# Altium PCB car ver1.PrjPCB.PcbDoc
Units mil, origin at the board's own origin, x right, y up, seen from the top; angles counter-clockwise.
Board outline 5825.03 x 2850.01 mil, 2 copper layers (Top Layer, Bottom Layer); 95 components, 142 nets, 389 pads, 71 vias.
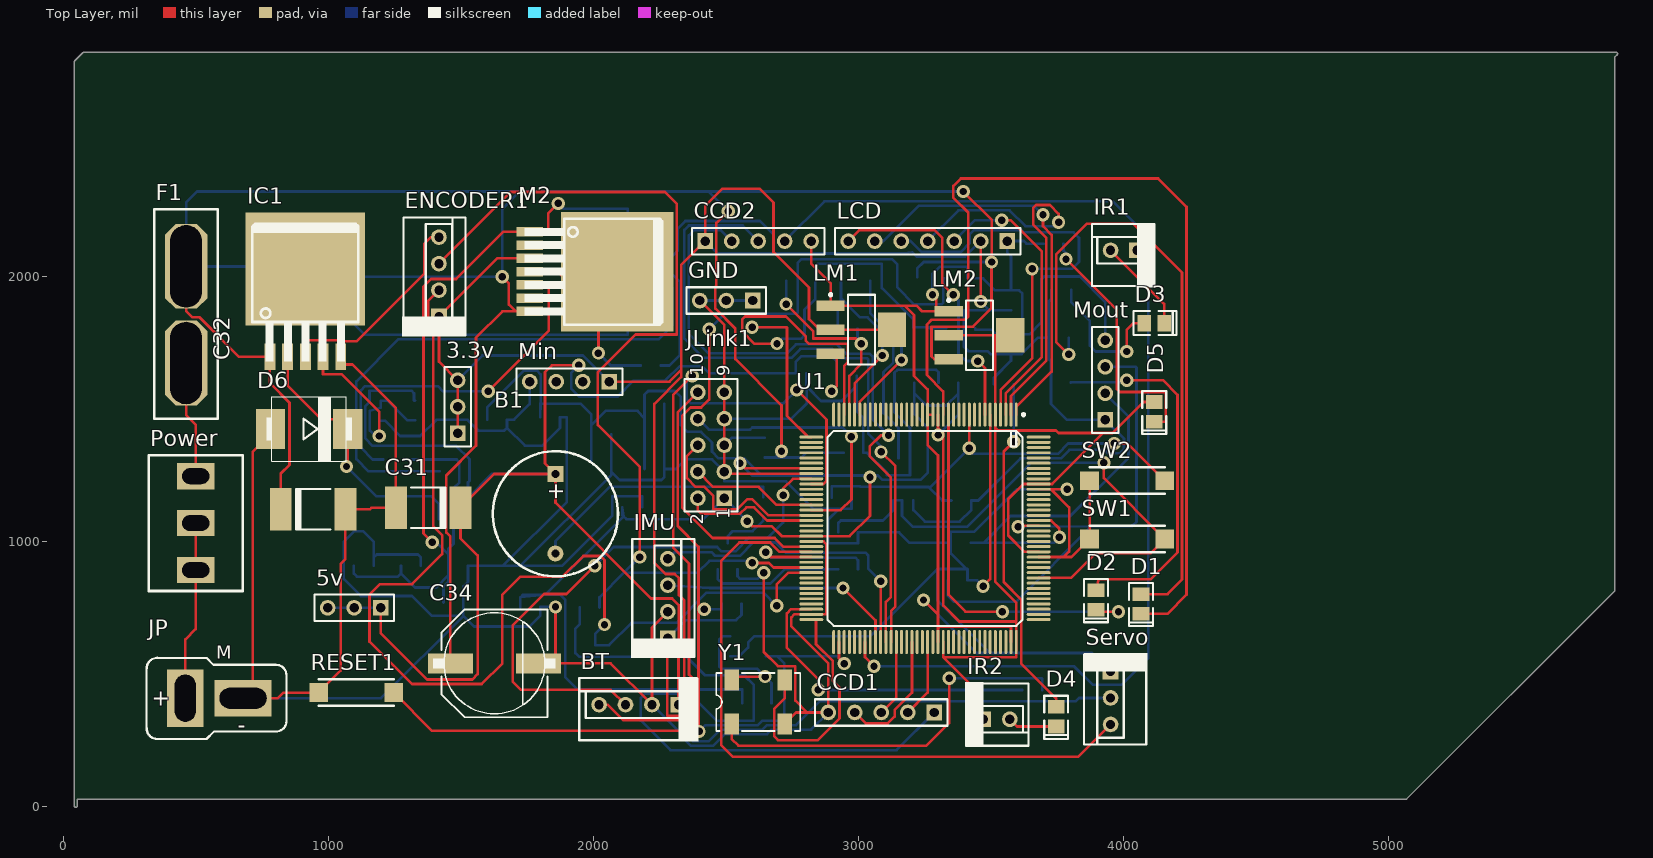
[diagram p0: Top Layer view]
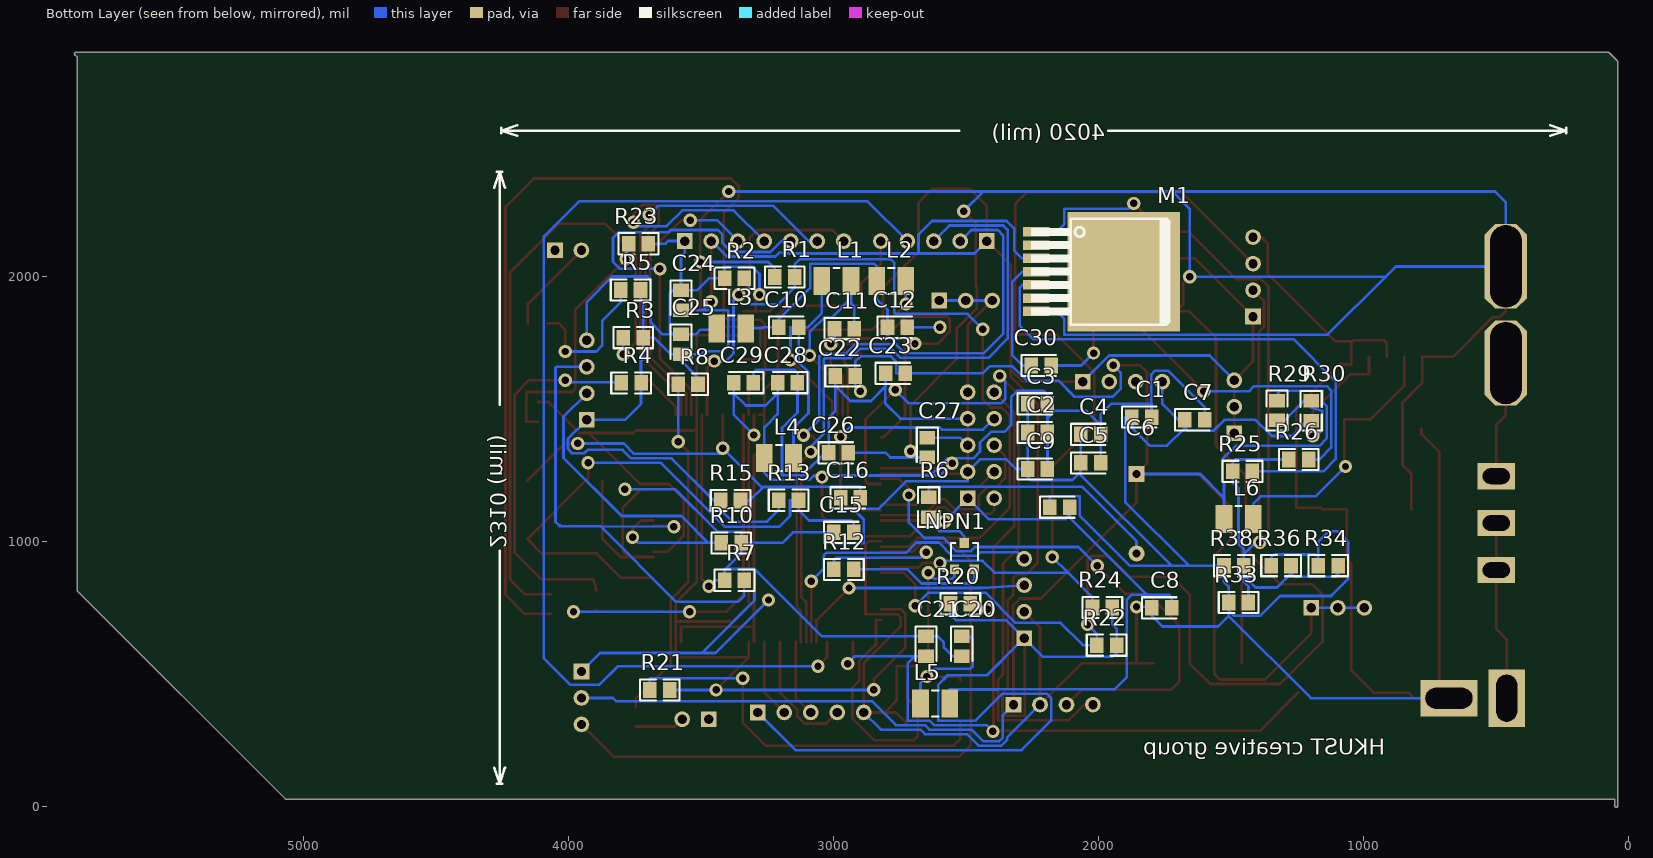
[diagram p1: Bottom Layer view, seen from below]

## Layer stack, top to bottom
Top Solder: solder mask 0.4, Solder Resist, Dk 3.5
Top Layer: signal copper 1.4
Dielectric 1: dielectric 12.6, FR-4, Dk 4.8
Bottom Layer: signal copper 1.4
Bottom Solder: solder mask 0.4, Solder Resist, Dk 3.5

## Board outline
39.98,0 39.98,2810 cw(c45,2810) 41.47,2813.56 41.45,2813.55 71.45,2843.55 71.44,2843.53 cw(c75,2840) 75,2845.02 5860,2845.02 cw(c5860,2840) 5865.01,2840 cw(c5860,2840) 5863.53,2836.44 5863.55,2836.45 5855.01,2827.92 5855.01,815 cw(c5850,815) 5853.53,811.44 5853.55,811.45 5068.55,26.45 5068.56,26.47 cw(c5065,30) 5065,24.98 50.02,24.98 50.02,0 cw(c45,0)

## Design rules (kind name [scope] priority, off if disabled: settings)
Clearance [All] p1: gap=7
HoleSize [All] p1: absolutevalues=TRUE maxlimit=248.03 minlimit=13.78 maxpercent=80.000 minpercent=20.000
PolygonConnect [All] p1: connectstyle=Relief reliefconductorwidth=10 reliefentries=4 polygonreliefangle="90 Angle" airgapwidth=10
RoomDefinition sc-internal [InComponentClass('sc-internal')] p1: confinementstyle=ConfineIn formatcopy=TRUE lockcomponents=FALSE outline 245.63,113.53 4246,113.53 4246,2435.41 245.63,2435.41
RoutingVias [All] p1: holewidth=28 width=50 viastyle="Through Hole" minholewidth=28 minwidth=50 maxholewidth=28 maxwidth=50
SolderMaskExpansion [All] p1: expansion=4
Width [All] p1: maxlimit=10 minlimit=10 preferedwidth=10
28 further rules are at their usual default settings.

## Components (designator, comment, footprint, x,y, rotation, side; value= is the part's Value field where it differs from the comment)
3.3v "Header 3" HDR1X3 1486.48,1407.53 r90 top (schematic designator 1)
5v "Header 3" HDR1X3 1195.63,748.53 r180 top (schematic designator 2)
B1 "Buzzer" Buzzer 1855.63,953.53 r90 top
BT "Bluetooth" 6410-04 2320.63,383.53 r180 top
C1 "100n" CC2012-0805 1835.63,1468.53 r180 bottom
C2 "100n" CC2012-0805 2229.49,1410.53 r180 bottom
C3 "100n" CC2012-0805 2229.5,1518.53 r180 bottom
C4 "100n" CC2012-0805 2028.5,1403.53 r180 bottom
C5 "100n" CC2012-0805 2028.5,1295.53 r180 bottom
C6 "100n" CC2012-0805 2145.63,1128.53 r180 bottom
C7 "100n" CC2012-0805 1635.63,1458.53 r180 bottom
C8 "100n" CC2012-0805 1760.63,748.53 r180 bottom
C9 "100n" CC2012-0805 2229.49,1272.53 r180 bottom
C10 "1u" CC2012-0805 3168.49,1807.53 r180 bottom
C11 "1u" CC2012-0805 2958.49,1802.53 r180 bottom
C12 "100n" CC2012-0805 2758.49,1807.53 r180 bottom
C15 "100nF" CC2012-0805 2960.63,1033.53 r180 bottom
C16 "100nF" CC2012-0805 2935.63,1163.53 r180 bottom
C20 "100n" CC2012-0805 2515.63,603.53 r270 bottom
C21 "100nF" CC2012-0805 2650.63,603.53 r270 bottom
C22 "10uF" CC2012-0805 2955.63,1623.53 r180 bottom
C23 "100nF" CC2012-0805 2765.63,1633.53 r180 bottom
C24 "100nF" CC2012-0805 3575.48,1909.75 r270 bottom
C25 "10uF" CC2012-0805 3575.48,1743.76 r270 bottom
C26 "10uF" CC2012-0805 2980.63,1333.53 r180 bottom
C27 "100nF" CC2012-0805 2645.63,1353.53 r270 bottom
C28 "100nF" CC2012-0805 3173.23,1598.53 r0 bottom
C29 "10uF" CC2012-0805 3339.22,1598.53 r0 bottom
C30 "100n" CC2012-0805 2215.63,1663.53 r180 bottom
C31 "220uF" CAPC7238N 1375.63,1128.53 r180 top
C32 "220uF" CAPC7238N 940.63,1118.53 r0 top
C34 "470uF/16V" SV-G 1625.63,538.53 r0 top
CCD1 "Header 5" HDR1X5 3285.63,353.53 r180 top
CCD2 "Header 5" HDR1X5 2421,2133 r0 top
D1 "LED" "SMD _LED" 4066,763 r90 top
D2 "LED" "SMD _LED" 3896,778 r90 top
D3 "LED" "SMD _LED" 4116,1823 r180 top
D4 "LED" "SMD _LED" 3746,338 r90 top
D5 "LED" "SMD _LED" 4116,1488 r90 top
D6 "D Schottky" SMC 910.63,1423.53 r180 top
ENCODER1 "" 6410-04 1416.48,1847.53 r90 top
F1 "20A Fuse" FUSE 461.48,1442.53 r90 top
GND "Header 3" HDR1X3 2600.63,1908.53 r180 top (schematic designator GND1)
IC1 "AP1501A" TO-263(5) 1306.48,2232.53 r0 top
IMU "" 6410-04 2280.63,633.53 r90 top (schematic designator I1)
IR1 "Header 2" 6410-02 4051,2098 r180 top (schematic designator P1)
IR2 "Header 2" 6410-02 3471,328 r0 top (schematic designator P2)
JLink1 "ISP" HDR2X5 2493.49,1162.53 r90 top
JP "BAT" "T-CONNECTOR (M)" 448.49,407.53 r0 top (schematic designator JP1)
L1 "10uH" CR3225-1210 2988.49,1982.53 r180 bottom
L2 "10uH" CR3225-1210 2781.48,1982.53 r180 bottom
L3 "10uH" CR3225-1210 3385.63,1803.53 r180 bottom
L4 "10uH" CR3225-1210 3205.63,1313.53 r180 bottom
L5 "10uH" CR3225-1210 2616,388 r0 bottom
L6 "22uH" CR3225-1210 1470.63,1083.53 r180 bottom
LCD "Header 7" HDR1X7 3561,2133 r180 top
LM1 "LM1117IMP-3.3" MP04A_M 3010.63,1798.53 r0 top
LM2 "LM1117IMP-3.3" MP04A_M 3456.48,1777.53 r0 top
M1 "BTN7971B" TO-263(7) 2233.49,1817.53 r0 bottom
M2 "BTN7971B" TO-263(7) 1758.49,1817.53 r180 top
Min "PWR" HDR1X4 2058.49,1602.53 r180 top (schematic designator Min1)
Mout "PWR" HDR1X4 3931,1458 r90 top (schematic designator Mout1)
NPN1 "BC847B" SOT-23 2505.63,943.53 r180 bottom
Power "toggle SWITCH" ToggleSwitch 320.63,418.53 r0 top (schematic designator sw3)
R1 "30k" CR2012-0805 3183.49,1997.53 r0 bottom
R2 "20k" CR2012-0805 3373.49,1992.53 r180 bottom
R3 "1k2" CR2012-0805 3755.63,1768.53 r180 bottom
R4 "1k2" CR2012-0805 3763.49,1597.53 r180 bottom
R5 "1k2" CR2012-0805 3765.63,1948.53 r180 bottom
R6 "330" CR2012-0805 2640.63,1128.53 r270 bottom
R7 "1k2" CR2012-0805 3373.49,852.53 r180 bottom
R8 "1k2" CR2012-0805 3548.49,1592.53 r180 bottom
R10 "1k2" CR2012-0805 3385.63,993.53 r0 bottom
R12 "10k" CR2012-0805 2960.63,893.53 r180 bottom
R13 "33" CR2012-0805 3169.24,1154.53 r180 bottom
R15 "4k7" CR2012-0805 3388.23,1153.53 r180 bottom
R20 "4k7" CR2012-0805 2520.63,763.53 r180 bottom
R21 "1k" CR2012-0805 3655.63,438.53 r180 bottom
R22 "10k" CR2012-0805 1968.49,607.53 r180 bottom
R23 "1k" CR2012-0805 3736,2123 r180 bottom
R24 "10k" CR2012-0805 1984.5,749.59 r180 bottom
R25 "5k1" CR2012-0805 1455.63,1263.53 r180 bottom
R26 "5k1" CR2012-0805 1243.23,1308.53 r180 bottom
R29 "4k7" CR2012-0805 1325.63,1493.53 r270 bottom
R30 "1k5" CR2012-0805 1196.48,1492.53 r270 bottom
R33 "0" CR2012-0805 1470.63,768.53 r180 bottom
R34 "0" CR2012-0805 1132.18,907.53 r180 bottom
R36 "0" CR2012-0805 1310.18,907.53 r180 bottom
R38 "0" CR2012-0805 1488.18,907.53 r180 bottom
RESET1 "RESET" PUSHBUTTOM 1245.63,428.53 r180 top
Servo "Header 3" 6410-03 3951,508 r270 top (schematic designator Servo1)
SW1 "" PUSHBUTTOM 4155.63,1008.53 r180 top
SW2 "" PUSHBUTTOM 4155.63,1228.53 r180 top
U1 "kinetis k60" LQFP50P2200X2200X160-144M 3250.63,1048.53 r270 top
Y1 "50MHZ" XTLOSC4_SM 2621,393 r0 top

## Footprints (in the part's own frame and the unit in brackets; to place one, negate y for a bottom-side part, rotate by r counter-clockwise, add the part's x,y. Pads: shape width x height; smd on the part's side, far side on the other; paste and mask are expansions set on the pad)
6410-02 [mm] "MOLEX 2.54mm KK CONNECTOR"
  rect 1.5x1.5 hole 0.9: 1(0,0)
  round 1.5 hole 0.9: 2(2.54,0)
  silkscreen extent -1.78,-2.54 4.32,3.56
6410-03 [mm] "MOLEX 2.54mm KK CONNECTOR"
  rect 1.5x1.5 hole 0.9: 1(-0.005,0)
  round 1.5 hole 0.9: 2(2.535,0) 3(5.075,0)
  silkscreen extent -1.78,-2.54 6.99,3.56
6410-04 [mm] "MOLEX 2.54mm KK CONNECTOR"
  rect 1.5x1.5 hole 0.9: 1(0.012,0.012)
  round 1.5 hole 0.9: 2(2.552,0.012) 3(5.092,0.012) 4(7.632,0.012)
  silkscreen extent -1.91,-2.54 9.53,3.56
Buzzer [mil]
  round 60 hole 30: 1(0,0)
  rect 60x60 hole 30: 2(300,0)
  silkscreen extent -86,-236 386,236, body extent -89,-235 519,237, height 380
CAPC7238N [mm] "Chip Capacitor, Body 7.2x3.8mm, IPC Medium Density"
  rect 2.1x4.1 smd: 1(-3.095,0.052) 2(3.105,0.052)
  silkscreen extent -1.65,-1.9 1.66,2, body extent -3.8,-2.29 3.8,2.31, height 3.1
CC2012-0805 [mm] "Chip Capacitor; Body 2.0 x 1.2 mm (LxW typ)"
  rect 1.3x1.5 smd: 1(-0.95,0) 2(0.95,0)
  silkscreen extent -1.91,-1.02 1.4,1.02, body extent -1,-0.64 1,0.62, height 0.78
CR2012-0805 [mm] "Chip Resistor; Body 2.0 x 1.3 mm (LxW typ)"
  rect 1.3x1.5 smd: 1(-0.95,0) 2(0.95,0)
  silkscreen extent -1.91,-1.02 1.91,1.02, body extent -1,-0.62 1,0.64, height 0.78
CR3225-1210 [mm] "Chip Resistor; Body 3.2 x 2.5 mm (LxW typ)"
  rect 1.6x2.7 smd: 1(-1.4,0) 2(1.4,0)
  silkscreen extent -0.3,-1.25 0.3,1.25, body extent -1.6,-1.27 1.6,1.23, height 1.35
FUSE [mil]
  oct 320x160 hole 120 slot 310 at 0 deg: 1(230,0) 2(595,0)
  silkscreen extent 20,-120 810,120
HDR1X3 [mm] "Connector; Header; 3 Position"
  rect 1.5x1.5 hole 0.9: 1(0,0)
  round 1.5 hole 0.9: 2(2.54,0) 3(5.08,0)
  silkscreen extent -1.27,-1.27 6.35,1.27
HDR1X4 [mm] "Connector; Header; 4 Position"
  rect 1.5x1.5 hole 0.9: 1(0,0)
  round 1.5 hole 0.9: 2(2.54,0) 3(5.08,0) 4(7.62,0)
  silkscreen extent -1.27,-1.27 8.89,1.27
HDR1X5 [mm] "Connector; Header; 5 Position"
  rect 1.5x1.5 hole 0.9: 1(0,0)
  round 1.5 hole 0.9: 2(2.54,0) 3(5.08,0) 4(7.62,0) 5(10.16,0)
  silkscreen extent -1.27,-1.27 11.43,1.27
HDR1X7 [mm] "Connector; Header; 7 Position"
  rect 1.5x1.5 hole 0.9: 1(0,0)
  round 1.5 hole 0.9: 2(2.54,0) 3(5.08,0) 4(7.62,0) 5(10.16,0) 6(12.7,0) 7(15.24,0)
  silkscreen extent -1.27,-1.27 16.51,1.27
HDR2X5 [mm] "Connector; Header; 5x2 Position"
  rect 1.5x1.5 hole 0.9: 1(0,0)
  round 1.5 hole 0.9: 2(0,2.54) 3(2.54,0) 4(2.54,2.54) 5(5.08,0) 6(5.08,2.54) 7(7.62,0) 8(7.62,2.54) 9(10.16,0) 10(10.16,2.54)
  silkscreen extent -1.27,-1.27 11.43,3.81
LQFP50P2200X2200X160-144M [mm] "LQFP, 144-Leads, Body 22.1x22.1mm (max), Pitch 0.50mm, IPC Low Density"
  oval 2.3x0.282 smd: 1(-10.9,8.75) 2(-10.9,8.25) 3(-10.9,7.75) 4(-10.9,7.25) 5(-10.9,6.75) 6(-10.9,6.25) 7(-10.9,5.75) 8(-10.9,5.25) 9(-10.9,4.75) 10(-10.9,4.25) 11(-10.9,3.75) 12(-10.9,3.25) 13(-10.9,2.75) 14(-10.9,2.25) 15(-10.9,1.75) 16(-10.9,1.25) 17(-10.9,0.75) 18(-10.9,0.25) 19(-10.9,-0.25) 20(-10.9,-0.75) 21(-10.9,-1.25) 22(-10.9,-1.75) 23(-10.9,-2.25) 24(-10.9,-2.75) 25(-10.9,-3.25) 26(-10.9,-3.75) 27(-10.9,-4.25) 28(-10.9,-4.75) 29(-10.9,-5.25) 30(-10.9,-5.75) 31(-10.9,-6.25) 32(-10.9,-6.75) 33(-10.9,-7.25) 34(-10.9,-7.75) 35(-10.9,-8.25) 36(-10.9,-8.75) 73(10.9,-8.75) 74(10.9,-8.25) 75(10.9,-7.75) 76(10.9,-7.25) 77(10.9,-6.75) 78(10.9,-6.25) 79(10.9,-5.75) 80(10.9,-5.25) 81(10.9,-4.75) 82(10.9,-4.25) 83(10.9,-3.75) 84(10.9,-3.25) 85(10.9,-2.75) 86(10.9,-2.25) 87(10.9,-1.75) 88(10.9,-1.25) 89(10.9,-0.75) 90(10.9,-0.25) 91(10.9,0.25) 92(10.9,0.75) 93(10.9,1.25) 94(10.9,1.75) 95(10.9,2.25) 96(10.9,2.75) 97(10.9,3.25) 98(10.9,3.75) 99(10.9,4.25) 100(10.9,4.75) 101(10.9,5.25) 102(10.9,5.75) 103(10.9,6.25) 104(10.9,6.75) 105(10.9,7.25) 106(10.9,7.75) 107(10.9,8.25) 108(10.9,8.75)
  oval 0.282x2.3 smd: 37(-8.75,-10.9) 38(-8.25,-10.9) 39(-7.75,-10.9) 40(-7.25,-10.9) 41(-6.75,-10.9) 42(-6.25,-10.9) 43(-5.75,-10.9) 44(-5.25,-10.9) 45(-4.75,-10.9) 46(-4.25,-10.9) 47(-3.75,-10.9) 48(-3.25,-10.9) 49(-2.75,-10.9) 50(-2.25,-10.9) 51(-1.75,-10.9) 52(-1.25,-10.9) 53(-0.75,-10.9) 54(-0.25,-10.9) 55(0.25,-10.9) 56(0.75,-10.9) 57(1.25,-10.9) 58(1.75,-10.9) 59(2.25,-10.9) 60(2.75,-10.9) 61(3.25,-10.9) 62(3.75,-10.9) 63(4.25,-10.9) 64(4.75,-10.9) 65(5.25,-10.9) 66(5.75,-10.9) 67(6.25,-10.9) 68(6.75,-10.9) 69(7.25,-10.9) 70(7.75,-10.9) 71(8.25,-10.9) 72(8.75,-10.9) 109(8.75,10.9) 110(8.25,10.9) 111(7.75,10.9) 112(7.25,10.9) 113(6.75,10.9) 114(6.25,10.9) 115(5.75,10.9) 116(5.25,10.9) 117(4.75,10.9) 118(4.25,10.9) 119(3.75,10.9) 120(3.25,10.9) 121(2.75,10.9) 122(2.25,10.9) 123(1.75,10.9) 124(1.25,10.9) 125(0.75,10.9) 126(0.25,10.9) 127(-0.25,10.9) 128(-0.75,10.9) 129(-1.25,10.9) 130(-1.75,10.9) 131(-2.25,10.9) 132(-2.75,10.9) 133(-3.25,10.9) 134(-3.75,10.9) 135(-4.25,10.9) 136(-4.75,10.9) 137(-5.25,10.9) 138(-5.75,10.9) 139(-6.25,10.9) 140(-6.75,10.9) 141(-7.25,10.9) 142(-7.75,10.9) 143(-8.25,10.9) 144(-8.75,10.9)
  silkscreen extent -11.02,-9.35 9.35,9.57, body extent -11,-11 11,11, height 1.6
MP04A_M [mm] "SOT223, 4-Leads, Body 6.5x3.5mm, Pitch 2.3mm, Lead Span 7mm, IPC Low Density"
  rect 2.7x1 smd: 1(-2.95,2.3) 2(-2.95,0) 3(-2.95,-2.3)
  rect 2.7x3.3 smd: 4(2.95,0)
  silkscreen extent -3.07,-3.35 1.3,3.47, body extent -1.85,-3.35 1.85,3.35, height 1.8
PUSHBUTTOM [mm]
  rect 1.8x1.8 smd: 1(7.2,0) 2(0,0)
  silkscreen extent 0,-1.27 7.2,1.27
SMC [mm]
  rect 2.8x3.8 smd: 1(3.319,0) 2(-4.081,0)
  silkscreen extent -4.48,-3.11 3.71,3.1, body extent -4.45,-3.05 3.68,3.05, height 2.4
"SMD _LED" [mm]
  rect 1.3x1.6 smd: 1(0.95,0) 2(-0.95,0)
  silkscreen extent -2.13,-1.15 2,1.15, body extent -1.03,-0.53 1.03,0.38, height 0.85
SOT-23 [mm]
  rect 0.9x0.95 smd: 1(-0.95,-1.25) 2(0.95,-1.25) 3(0,1.25)
  silkscreen extent -2.08,-1.37 1.3,1.25, body extent -1.5,-1.27 1.5,1.23, height 1.06
SV-G [mil]
  rect 170x76 smd: 1(-166.52,0.43) 2(165.96,0.43)
  silkscreen extent -232,-203 231,204, body extent -226,-202 230,204, height 402
"T-CONNECTOR (M)" [mm]
  rect 3.5x5.5 hole 2 slot 4.5 at 90 deg: 1(0.254,0)
  rect 5.5x3.5 hole 2 slot 4.5 at 0 deg: 2(5.791,0)
  silkscreen extent -3.45,-3.91 9.96,3.86
TO-263(5) [mm]
  rect 11.43x10.795 smd: 0(-10.033,-5.207)
  rect 1.05x2.54 smd: 1(-13.433,-13.623) 2(-11.733,-13.623) 3(-10.033,-13.623) 4(-8.333,-13.623) 5(-6.633,-13.623)
  silkscreen extent -15.11,-14.1 -4.95,-0.89
TO-263(7) [mil]
  rect 425x450 smd: 0(-330,-200)
  rect 100x36 smd: 1(0,-350) 2(0,-300) 3(0,-250) 4(0,-200) 5(0,-150) 6(0,-100) 7(0,-50)
  silkscreen extent -500,-400 20,0
ToggleSwitch [mm]
  rect 3.6x2.5 hole 1.5 slot 2.6 at 0 deg: 1(4.5,21) 2(4.5,16.5) 3(4.5,12)
  silkscreen extent 0,10 9,23, body extent 1.14,10.15 8,22.87, height 28.7
XTLOSC4_SM [mil] "XTLOSC4_SM"
  rect 55x80 smd: 1(-100,-83.07) 2(100,-83.07) 3(100,83.07) 4(-100,83.07)
  silkscreen extent -159,-110 158,110, body extent -144,-95 144,94, height 39

## Part data
3.3v 5v GND Servo: "Header, 3-Pin"
BT ENCODER1 IMU Min Mout: library part "Header 4", "Header, 4-Pin"
C1 C2 C3 C4 C5 C6 C7 C8 C9 C10 C11 C12 C15 C16 C20 C21 C23 C24 C27 C28: library part "Cap Semi", "Capacitor (Semiconductor SIM Model)"
C22 C25 C26 C29: library part "Cap Pol3", "Polarized Capacitor (Surface Mount)"
C30: library part Cap, "Capacitor"
C31 C32: library part "Cap Pol1", "Polarized Capacitor (Radial)"
C34: library part "Cap Pol2", "Polarized Capacitor (Axial)"
CCD1 CCD2: "Header, 5-Pin"
D1 D2 D3 D4 D5: "Typical RED GaAs LED"
D6: "Schottky Diode"
F1: library part Fuse, "Fuse"
IC1: "5A Step-Down Switching Mode Voltage Regulator"
IR1 IR2: "Header, 2-Pin"
JLink1: library part "Header 5X2", "Header, 5-Pin, Dual row"
JP: library part "Header 2", "Header, 2-Pin"
L1 L2 L3 L4 L5 L6: library part Inductor, "Inductor"
LCD: "Header, 7-Pin"
LM1 LM2: "800mA Low-Dropout Linear Regulator"
M1 M2: library part "BTS 7970B"
NPN1: "NPN"
R1 R2 R3 R4 R5 R6 R7 R8 R10 R12 R13 R15 R20 R21 R22 R23 R24 R25 R26 R29 R30 R33 R34 R36 R38: library part Res2, "Resistor"
RESET1 SW1 SW2: library part SW-SPST, "Single-Pole, Single-Throw Switch"
Y1: library part CLKGEN-SM

## Via types
v1: diameter 50, hole 28, Top Layer to Bottom Layer, 71 vias

## Nets (pads, with @x,y where several pads share a name; then routed paths per layer and width w, separated by ;. In a path a pad name is that pad's centre, name@x,y a point inside that pad or via, vN(x,y) a via of type N, cw(c..) or ccw(c..) an arc to the next point about the centre after c; other vN are vias at no path point)
8V: C26.2 C27.2 C32.1 C34.1 F1.2 IC1.1 LM2.3 M1.7 M2.7 R1.2 | length 11801.1
  Top Layer w10: F1.2 461.48,1869.52 486,1845 513,1845 662,1696 IC1.1@777.62,1696 ; IC1.1 IC1.1@777.62,1696 ; C32.1 818.78,1254.78 852,1288 852,1522.62 777.62,1597 IC1.1@777.62,1696 ; C34.1 1459,538.96 1459,1018 1444,1033 1444,1249 1556,1361 1556,1768.53 1655,1867.53 1706,1867.53 ; v1(1655,1998) 1680,1973 1680,1893.53 1706,1867.53 ; M2.7 1706,1867.53 ; v1(2508,2246) 2463,2201 2463,1964 2459,1960 2459,1878 2535,1802 2535,1687 2709,1513 v1(2709,1340) ; LM2.3 3286,1686.98 3275,1697.98 3275,1810 3432,1810 3502,1880 v1(3502,2054) ; v1(3395,2320) 3503,2212 v1@3503,2055
  Bottom Layer w10: M1.7 2157.53,1867.53 2128,1838 2128,1780 1134,1780 916,1998 ; v1(2508,2246) 2434,2320 ; C27.2 2685.13,1316.13 ; v1(2709,1340) 2685.13,1316.13 ; C26.2 2802.4,1333.53 2785,1316.13 2685.13,1316.13 ; R1.2 3220.9,2028.9 3246,2054 v1(3502,2054) v1@3503,2055 ; v1(3395,2320) 2434,2320 ; 916,1998 877,2037 461.48,2037 F1.2 461.48,2278 503.48,2320 1720,2320 ; 916,1998 v1(1655,1998) 1655,2255 1720,2320 ; 1720,2320 2434,2320
A3V3: C10.2 L1.1 L4.2 U1.31 | length 1189.9
  Top Layer w10: U1.31 3004.57,1526.57 v1(3162,1684)
  Bottom Layer w10: L1.1 3043.61,1861.06 3097.14,1807.53 C10.2 ; L4.2 3150.51,1427 3094,1483.51 3094,1638 3131.09,1675.09 C10.2 ; v1(3162,1684) 3162,1807.53 C10.2
ADC0_DM0: U1.28
ADC0_DM1: U1.24
ADC0_DM3: U1.30
ADC0_DP0: U1.27
ADC0_DP1: U1.23
ADC0_DP3: U1.29
ADC0_SE16: U1.36
ADC1_DM1: U1.26
ADC1_DP1: U1.25
ADC1_SE16: U1.35
AGND: C10.1 C12.1 L2.1 L3.2 U1.34 | length 1989.8
  Top Layer w10: v1(2692,1746) 2606,1746 2561,1791 2561,1838 2571,1848 2726,1848 2800,1774 2800,1758 2813,1745 2959.64,1745 2959.64,1676 2945.51,1661.87 U1.34
  Bottom Layer w10: v1(2692,1746) 2710,1764 2781.9,1764 2795.9,1778 C12.1 2795.9,1874 2836.6,1914.7 L2.1 2836.6,2038 2846.6,2048 3088,2048 3088,1955.9 3205.9,1838 C10.1 3266,1807.53 3270,1803.53 L3.2
BUT1: C16.2 R15.2 SW2.2 U1.10 | length 2059.7
  Top Layer w10: v1(3417.95,1350.95) U1.10 ; v1(3965,1369) 4015.16,1369 SW2.2
  Bottom Layer w10: C16.2 2898.23,1207 ; R15.2 3316,1153.53 3268.26,1201.26 ; v1(3965,1369) 3791,1369 3752,1330 3417.95,1330 v1(3417.95,1350.95) 3268.26,1201.26 ; 2898.23,1207 3006.16,1207 3008.16,1205 ; 2898.23,1207 3008.16,1205 ; 3008.16,1205 3264.53,1205 3268.26,1201.26 ; 3008.16,1205 3268.26,1201.26
BUT2: C15.2 R13.2 SW1.2 U1.117 | length 2190
  Top Layer w10: U1.117 3801.52,861.52 3894,954 4101.1,954 SW1.2 3926,1238.16 v1(3926,1296)
  Bottom Layer w10: C15.2 2923.23,1068 2933.23,1078 3091.84,1078 3131.84,1118 R13.2 3164,1154.53 3164,1096 3206,1054 3409,1054 3651,1296 v1(3926,1296)
BUZZER: R12.1 U1.60 | length 573.8
  Top Layer w10: v1(2650,958) 2667.74,940.26 U1.60
  Bottom Layer w10: v1(2650,958) 2670,938 2988.03,938 2998.03,928 R12.1
CCD0_AD: CCD1.3 U1.85 | length 289.4
  Top Layer w10: CCD1.3 3142.36,410.26 U1.85
CCD0_CLK: CCD1.2 U1.91 | length 296.9
  Top Layer w10: CCD1.2 3260.47,428.37 U1.91
CCD0_SI: CCD1.4 U1.88 | length 486.8
  Top Layer w10: CCD1.4 3027.16,312 3110,312 3136,338 3136,362.63 3201.42,428.05 U1.88
CCD1_AD: CCD2.3 U1.84 | length 2590.9
  Top Layer w10: v1(3085,1337) 3139,1283 3139,753.31 3122.68,736.99 U1.84
  Bottom Layer w10: CCD2.3 2562.47,2191.53 2359,2191.53 2342.1,2174.63 2342.1,1764.53 2414.63,1692 2746.22,1692 2780.22,1726 2900.67,1726 2935.67,1691 3031,1691 3036,1686 3036,1406 3085,1357 v1(3085,1337)
CCD1_CLK: CCD2.2 U1.83 | length 2506.3
  Top Layer w10: U1.83 3102.99,770.31 3122,789.32 3122,1241.01 3042,1321.01 3042,1358 3084,1400 v1(3113,1400)
  Bottom Layer w10: CCD2.2 2479.47,2174.53 2379.47,2174.53 2359.1,2154.16 2359.1,1782.9 2433,1709 2729.22,1709 2763.22,1743 2917.67,1743 2952.67,1708 3042,1708 3053,1697 3053,1460 v1(3113,1400)
CCD1_SI: CCD2.4 U1.79 | length 4291.9
  Top Layer w10: U1.79 3024.25,562 v1(3058.25,528)
  Bottom Layer w10: CCD2.4 2871,2283 3960,2283 4093,2150 4093,558 3993,458 3884,458 3814,528 v1(3058.25,528)
DAC0_OUT: U1.38
DAC1_OUT: U1.39
EXTAL: U1.72 Y1.3 | length 943.2
  Top Layer w10: Y1.3 2721,407 2681,367 2681,264 2696,249 2846,249 2928,331 2928,448 2903,473 2903,547 2839,611 2839,704.04 U1.72
FTM1PHA: U1.64
FTM1PHB: U1.65
FTM2PHA: ENCODER1.3 R24.1 U1.62 | length 3629.1
  Top Layer w10: ENCODER1.3 1686,2318 2268.99,2318 2312.99,2274 2312.99,1780.53 2158.53,1780.53 2016,1638 2016,1438 2174,1280 v1(2174,940.1) ; v1(2598,918) 2661.72,918 2678.83,900.89 U1.62
  Bottom Layer w10: R24.1 2021.9,788 2114.9,881 ; v1(2174,940.1) 2114.9,881 ; v1(2598,918) 2590,926 2437,926 2392,881 2114.9,881
FTM2PHB: ENCODER1.2 R22.1 U1.63 | length 4215.3
  Top Layer w10: ENCODER1.2 1374.47,1906.47 1374.47,1808.53 1395,1788 1395,1056 1428,1023 1428,951 1315,838 1194,838 1154,798 1154,621 1314,461 1577,461 1655,539 1655,798 1723,866 1883,866 1961,944 2026,944 2041,929 v1(2041,685.11) ; v1(2691,756) 2691,836 2736.21,881.21 U1.63
  Bottom Layer w10: v1(2041,685.11) 2005.89,650 R22.1 2058,607.53 2142.47,692 2312,692 2426,806 2641,806 v1(2691,756)
GND: BT.2 C1.1 C2.1 C3.1 C4.1 C5.1 C6.1 C7.1 C8.1 C9.1 C15.1 C16.1 C20.2 C21.1 C22.1 C23.1 C24.1 C25.1 C26.1 C27.1 C28.1 C29.1 C31.2 C32.2 C34.2 CCD1.5 CCD2.5 D6.1 ENCODER1.4 GND.1 GND.2 GND.3 IC1.3 IC1.5 IMU.2 JLink1.3 JLink1.5 JLink1.7 JLink1.9 JP.2 L3.1 LCD.1 LM1.1 LM2.1 Min.4 Mout.4 NPN1.1 R2.1 R7.1 R10.1 R23.2 R30.2 R33.1 R34.1 R36.1 R38.1 RESET1.1 Servo.1 SW1.1 SW2.1 U1.6 U1.17 U1.18 U1.44 U1.57 U1.71 U1.93 U1.107 U1.121 U1.134 Y1.2 | length 27674.4
  Top Layer w10: JP.2 JP.2@713,407.53 ; D6.1 779.96,1404 713,1337.04 JP.2@713,407.53 ; IC1.3 911.48,1748 922.48,1759 1034.34,1759 1045.34,1748 ; ENCODER1.4 1386,2148 1361,2123 1361,2010.06 1105.94,1755 1045.34,1755 1045.34,1748 ; C34.2 C34.2@1856,538.96 ; v1(1856,752) C34.2@1856,538.96 ; IMU.2 2220.16,674.01 BT.2 2064.24,538.96 C34.2@1856,538.96 ; GND.3 2493.5,1815.66 JLink1.9 JLink1.7 JLink1.5 JLink1.3 2500.8,1255.22 U1.44 ; v1(2642,881) 2642,582.07 2696,528.07 2761,528.07 2761,398 2805.47,353.53 ; Y1.2 2764.6,353.53 2805.47,353.53 ; CCD2.5 2821,2047.49 2894.49,1974 LM1.1 3172.92,1889.08 ; U1.57 2867.68,999.32 2879,988 2879,723.72 U1.71 2757.09,723.72 2746,712.63 2746,678.63 2885.63,539 CCD1.5 2805.47,353.53 ; v1(3245,778) 3299.84,723.16 ; v1(3279,1931) 3293,1917 LM2.1@3293,1868.08 ; U1.17 U1.18 ; U1.93 3299.84,670.84 ; LM2.1 LM2.1@3293,1868.08 ; v1(3469.92,830.08) 3496.69,856.84 U1.6 ; U1.107 3575.43,677 3306,677 3299.84,670.84 ; U1.121 3774.26,940.26 ; U1.134 3726,1196.17 ; v1(3787,1196.17) 3726,1196.17 ; SW2.1 SW1.1 3803.89,940.26 3774.26,940.26 ; JP.2@713,407.53 808,407.53 829,428.53 RESET1.1 1045,511.37 1045,914.13 1062.87,932 C32.2 1155,1120.58 1160.9,1126.48 C31.2 1253.39,1502.61 1089,1667 1045.34,1667 IC1.5 1045.34,1748 ; 3172.92,1889.08 3209,1853 3209,1624.47 3260.47,1573 U1.18 ; 3172.92,1889.08 3218,1889.08 3239,1868.08 LM2.1@3293,1868.08 ; U1.18 3260.47,1363.38 3299.84,1324.01 3299.84,723.16 ; 3299.84,670.84 3299.84,723.16 ; 3726,1196.17 3795,1127.17 3795,961 3774.26,940.26
  Bottom Layer w10: JP.2 1197.56,407.53 1508.03,718 ; R34.1 1169.58,938 ; R30.2 1211.51,1455.13 1269.64,1397 1345,1397 1406,1458 1524,1458 1565,1417 1662.03,1417 1673.03,1428 ; R36.1 1347.58,938.42 1336,950 1181.58,950 1169.58,938 ; Min.4 1758.49,1518 1699.02,1458.53 C7.1 1673.03,1428 ; v1(1856,752) 1798.03,752 C8.1 1798.03,718 1758.03,678 1548.03,678 1508.03,718 ; C4.1 C5.1 2065.9,1263.1 ; C6.1 2183.03,1170.06 2070.64,1170.06 2070.64,1096.16 1882,907.53 1724.53,907.53 ; BT.2 2344,259.21 2344,250 2366,228 2452,228 2495.85,271.85 2654.26,271.85 2671.26,288.85 2820.95,288.85 CCD1.5 ; C3.1 C2.1 C9.1 ; GND.3 GND.2 GND.1 ; JLink1.5 2521.9,1390.93 C27.1 ; JLink1.7 2747.56,1462.53 2804.35,1519.32 2804.35,1583.65 ; C20.2 2551.13,566.13 2583,598 2583,618 2605.93,640.93 C21.1 3043.93,640.93 3298,895 ; NPN1.1 2543.03,868 2553.03,858 2619,858 v1(2642,881) ; C16.1 2973.03,1122 2926,1122 ; C22.1 2993.03,1586.06 ; v1(3245,778) 3445,578 3496,578 ; v1(3279,1931) 3279,2009 3306,2036 3410.9,2036 R2.1 3470,1992.53 3515.38,1947.15 C24.1 ; C29.1 3301.82,1638 3292.82,1647 3146,1647 3135.83,1636.83 C28.1 3135.83,1486.18 3194.01,1428 3194.01,1248.37 3107,1248.37 3107,1258.53 3032,1333.53 C26.1 3018.03,1466 2993.03,1491 2993.03,1586.06 ; L3.1 3440.75,1798.41 3501.11,1798.41 3518.37,1781.16 C25.1 3606,1781.16 ; v1(3469.92,830.08) 3447.47,852.53 R7.1 3410.9,891 ; R23.2 3634,2123 3624,2133 LCD.1 3561,2090.54 3575.48,2076.06 C24.1 ; v1(3787,1196.17) 3597.17,1196.17 3437,1036 3348.23,1036 R10.1 ; Mout.4 3931,1903 3835,1999 3701,1999 3690,1988 3690,1826.61 3644.55,1781.16 3606,1781.16 ; Servo.1 3881.18,578 3496,578 ; 1169.58,938 1169.58,998 1129.58,1038 1097,1038 1057,998 1057,857 1121,793 1314,793 1389,718 1488.03,718 1508.03,738 ; 1508.03,718 1508.03,738 ; 1508.03,738 R33.1 1508.03,829 1525.58,846.55 R38.1 1658.53,907.53 ; 1658.53,907.53 1898,1147 1898,1468.53 C1.1 1873.03,1428.03 1806,1361 1740.03,1361 1673.03,1428 ; 1658.53,907.53 1724.53,907.53 ; 1724.53,907.53 2065.9,1248.9 2065.9,1263.1 ; 2065.9,1263.1 2098,1231 2256,1231 2266.9,1241.9 C9.1 ; C9.1 2311,1272.53 2347.47,1309 2447.02,1309 JLink1.3 2493.5,1226 2726,1226 2830,1122 2926,1122 ; 2804.35,1583.65 2803.03,1584.97 C23.1 2804.35,1633.53 2804.35,1583.65 ; 2804.35,1583.65 2859,1529 2935.97,1529 2993.03,1586.06 ; 2926,1122 2885,1081 2885,992 2998.03,992 C15.1 3153,1033.53 3193,993.53 R10.1 ; 3298,895 3298,776 3496,578 ; 3298,895 3406.9,895 ; R10.1 3348.23,953.67 3406.9,895 ; 3406.9,895 3410.9,895 3410.9,891 ; 3406.9,895 3410.9,891 ; C24.1 3606,1947.15 3618,1935.15 3618,1793.16 3606,1781.16
HREF: U1.92
I2C0_SCL: IMU.3 U1.81 | length 916.2
  Top Layer w10: v1(2941.11,823.51) 3063.62,701 U1.81
  Bottom Layer w10: IMU.3 2437.49,823.51 v1(2941.11,823.51)
I2C0_SDA: IMU.4 U1.82 | length 1158.9
  Top Layer w10: U1.82 v1(3083.31,849)
  Bottom Layer w10: IMU.4 2304.15,958 2445.95,958 2458.91,945.04 2552.35,945.04 2602.31,995 2687,995 2725,957 3026,957 3036,947 3036,896.31 v1(3083.31,849)
LED1: D1.2 U1.15 | length 3652.4
  Top Layer w10: U1.15 3319.53,1566 3258,1627.53 3258,1818 3276,1836 3402,1836 3414,1848 3414,2240 3358,2296 3358,2341 3386,2369 4131,2369 4238,2262 4238,798 4165.6,725.6 D1.2
LED2: D2.2 U1.14 | length 1439.6
  Top Layer w10: U1.14 3339.21,798 3403.21,734 v1(3543,734) ; D2.2 3896,734 v1(3981,734)
  Bottom Layer w10: v1(3543,734) v1(3981,734)
LED3: U1.13
LED4: U1.12
MCU_33V: C1.2 C2.2 C3.2 C4.2 C5.2 C6.2 C7.2 C8.2 C9.2 C28.2 C29.2 D5.1 JLink1.1 L4.1 L5.1 LM2.2 LM2.4 R21.2 U1.5 U1.16 U1.43 U1.56 U1.70 U1.94 U1.108 U1.122 U1.135 | length 12662.3
  Top Layer w10: v1(2552,1294) 2571.09,1274.91 U1.43 ; v1(2579,1075) 2597.05,1056.95 2672.05,1056.95 2710,1019 U1.56 2966,1019 3043,1096 v1(3043,1242) ; U1.70 2744.41,743.41 2729,728 2729,597.18 2848,478.18 v1(2848,439) ; v1(3300,1401) 3300,1428 ; U1.94 3319.53,562 ; LM2.2 3517,1777.53 ; v1(3443,438.53) 3319.53,562 ; LM2.4 3517,1777.53 ; U1.122 3626,959.95 3565,1020.95 3565,1158.85 3622,1215.85 U1.135 3730.62,1215.85 3923.05,1408.29 ; D5.1 4075.4,1525.4 3958.29,1408.29 3923.05,1408.29 ; 3300,1428 U1.16 3299.84,1428.16 3300,1428 ; 3300,1428 3320,1408 3320,757 3380,697 3595.12,697 ; 3319.53,562 3595.12,562 U1.108 3595.12,697 ; 3516.38,1428 U1.5 3516.38,1776.91 3517,1777.53 ; 3516.38,1428 3526.38,1418 3745,1418 3754.71,1408.29 3923.05,1408.29 ; 3516.38,1428 3516.38,846.53 3595.12,767.79 3595.12,697
  Bottom Layer w10: C7.2 1598.23,1505.23 1737.06,1644.06 1786,1644.06 1800.02,1630.03 1800.02,1522 ; C8.2 1723.23,788 ; C5.2 C4.2 1991.1,1438 ; C9.2 C2.2 2192.09,1464 ; v1(2552,1294) 2598,1248 2634,1248 ; L5.1 2560.88,440 2380.26,440 2378.69,441.58 1937.42,441.58 1893,486 1893,778 1873,798 1818.1,798 ; v1(2579,1075) 2579,1077.02 JLink1.1 2413.97,1083 2123.23,1083 2113.17,1093.06 ; v1(2848,439) 2848.47,438.53 v1(3443,438.53) R21.2 ; v1(3043,1242) v1@3043,1248 ; C28.2 3210.63,1558 ; v1(3300,1401) 3376.62,1477.62 3376.62,1558 ; C29.2 3376.62,1558 ; 1723.23,788 1733.23,798 1818.1,798 ; 1723.23,788 1818.1,798 ; 1800.02,1522 1798.23,1520.21 C1.2 1800.02,1522 ; 1800.02,1522 1803.02,1519 1950.1,1519 1991.1,1478 1991.1,1438 ; 1818.1,798 2113.17,1093.06 ; 1991.1,1438 2045.1,1492 2166,1492 2192.09,1464 ; 2113.17,1093.06 C6.2 2108.23,1098 2113.17,1093.06 ; 2192.09,1464 C3.2 2192.09,1553.09 2206,1567 2306,1567 2329,1544 2329,1438 2354,1413 2406,1413 2446.88,1372.12 2446.88,1338 2471.88,1313 2569,1313 2634,1248 ; 2634,1248 v1@3043,1248 ; v1@3043,1248 3073.28,1248 3089.91,1231.37 3234.12,1231.37 3260.75,1258 L4.1 3260.75,1430 3210.63,1480.12 3210.63,1558 ; 3210.63,1558 3256.63,1512 3330.62,1512 3376.62,1558
MIGND: M1.1 M2.1 R25.1 R26.1 R33.2 R34.2 R36.2 R38.2 | length 3413
  Top Layer w10: v1(1391,996) 1357.47,1029.53 1357.47,1961.47 1386,1990 1481,1990 1658.53,2167.53 M2.1 1817.53,2167.53 1828,2178 1828,2237 v1(1866,2275)
  Bottom Layer w10: R34.2 1094.78,877.22 1106,866 1260.78,866 1272.78,878 ; R36.2 1272.78,878 ; R26.1 1482.5,1308.53 1493.03,1298 R25.1 1493.03,1222.03 1471,1200 1471,990 1450.78,969.78 1450.78,951.22 ; v1(1391,996) 1406,996 1450.78,951.22 ; R33.2 1433.23,829 1450.78,846.55 1450.78,869.78 ; v1(1866,2275) 1886,2255 2128,2255 2128,2198 2158.47,2167.53 M1.1 ; 1272.78,878 1325.78,825 1406,825 1450.78,869.78 ; 1450.78,869.78 R38.2 1450.78,951.22
MO1A: M1.2
MO1B: M2.2
MOTOR1A: Mout.3 R7.2 U1.127 | length 1965.2
  Top Layer w10: v1(3602,1055) 3605.37,1058.37 U1.127
  Bottom Layer w10: R7.2 3336.09,795.91 3361,771 3594.12,771 3879.64,1056.51 ; v1(3602,1055) 3879.64,1056.51 ; Mout.3 4046,1658 4049,1655 4049,1073.26 4036.37,1060.63 4032.25,1060.63 4032.25,1056.51 3879.64,1056.51
MOTOR1B: Mout.2 R10.2 U1.128 | length 1426.4
  Top Layer w10: U1.128 3726.99,1078.06 3758,1047.04 v1(3758,1014.53)
  Bottom Layer w10: R10.2 3472.5,993.53 ; v1(3758,1014.53) 3737,993.53 3472.5,993.53 ; Mout.2 4019,1470 4019,1315 3799,1095 3573.97,1095 3472.5,993.53
NetB1_1: B1.1 R6.1 | length 957.2
  Bottom Layer w10: B1.1 1855.63,1000.63 2061,1206 2640.63,1206 R6.1
NetC11_1: C11.1 L2.2 U1.33 | length 798.6
  Top Layer w10: v1(2726.36,1895) 2829,1792.36 2829,1765 2990,1765 v1(3010,1745) 3010,1669.3 2965.2,1624.5 U1.33
  Bottom Layer w10: v1(2726.36,1895) L2.2 ; C11.1 2995.9,1759.1 v1(3010,1745)
NetC11_2: C11.2 L1.2 U1.32 | length 749.9
  Top Layer w10: U1.32 2984.88,1595.88 v1(3090,1701)
  Bottom Layer w10: C11.2 2921.09,1886 2933.38,1898.28 2933.38,1917.62 ; L1.2 2933.38,1917.62 ; v1(3090,1701) 3090,1789 3034,1845 3006,1845 2933.38,1917.62
NetC20_1: C20.1 L5.2 Y1.4 | length 586.6
  Top Layer w10: Y1.4 2521,489 v1(2647,489)
  Bottom Layer w10: C20.1 2486,640.93 2474,628.93 2474,528 2484,518 2618,518 v1(2647,489) 2671.12,464.88 L5.2
NetD1_1: D1.1 R3.1 | length 2396.8
  Top Layer w10: v1(3793,1705) 3746,1752 3746,2082.57 3862.43,2199 4036,2199 4221,2014 4221,855.4 4166,800.4 D1.1
  Bottom Layer w10: v1(3793,1705) R3.1
NetD2_1: D2.1 R4.1 | length 1409
  Top Layer w10: D2.1 3906,857 4103,857 4204,958 4204,1552.49 4148.49,1608 v1(4012,1608)
  Bottom Layer w10: R4.1 3800.9,1600 4004,1600 v1(4012,1608)
NetD3_1: D3.1 R5.1 | length 546.6
  Top Layer w10: v1(4012,1716) 4012,1798 4037,1823 D3.1
  Bottom Layer w10: R5.1 3803.03,1901.97 3873,1832 3873,1738 3895,1716 v1(4012,1716)
NetD3_2: D3.2 IR1.2 | length 358.8
  Top Layer w10: IR1.2 4153.4,1895.6 D3.2
NetD4_1: D4.1 R8.1 | length 1314.8
  Top Layer w10: v1(3585.9,1375.9) 3548,1338 3548,845.37 3614,779.37 3614,539 3746,407 D4.1
  Bottom Layer w10: v1(3585.9,1375.9) R8.1
NetD4_2: D4.2 IR2.2 | length 186.3
  Top Layer w10: IR2.2 3598.4,300.6 D4.2
NetD5_2: D5.2 R23.1 | length 977.5
  Top Layer w10: v1(3783,2065) 3975,1873 3975,1573.99 3986,1562.99 4159.5,1562.99 4159.5,1450.6 D5.2
  Bottom Layer w10: R23.1 3773.4,2096.6 3783,2087 v1(3783,2065)
NetD6_2: D6.2 IC1.2 L6.2 | length 1032.4
  Top Layer w10: IC1.2 844.55,1588 971.55,1461 1071.3,1461 D6.2 1071.3,1286.3 v1(1067,1282)
  Bottom Layer w10: v1(1067,1282) 1179,1170 1386,1170 1415.51,1140.49 L6.2
NetIC1_4: IC1.4 R29.2 R30.1 | length 777.6
  Top Layer w10: IC1.4 978.41,1629.59 1049.41,1629.59 1191,1488 v1(1191,1397)
  Bottom Layer w10: v1(1191,1397) 1175.95,1397 1154.95,1418 1154.95,1492.72 1196.48,1503.2 R30.1 1224,1529.93 1297.81,1456.12 R29.2
NetM1_5: M1.5 R25.2 | length 2116.7
  Bottom Layer w10: R25.2 1150.47,1263.53 1103.95,1310.05 1103.95,1602.95 1264,1763 2246,1763 2296,1813 2296,1957.53 2286,1967.53 M1.5
NetM2_5: M2.5 R26.2 | length 1373.8
  Top Layer w10: v1(1602,1566) 1830,1794 1830,1953.53 1816,1967.53 M2.5
  Bottom Layer w10: R26.2 1166,1308.53 1120.95,1353.58 1120.95,1568.95 1137,1585 1412,1585 1431,1566 v1(1602,1566)
NetNPN1_2: NPN1.2 R12.2 | length 520.5
  Bottom Layer w10: NPN1.2 2468.23,858 2485.71,840.51 2667.07,840.51 2720.08,893.53 R12.2
NetNPN1_3: NPN1.3 R6.2 | length 198.4
  Bottom Layer w10: NPN1.3 2505.63,1018.63 2525,1038 2600.32,1038 2640.63,1078.31 R6.2
NetR21_1: R21.1 Y1.1 | length 1487.2
  Top Layer w10: Y1.1 2521,253 2546,228 3256,228 3342,314 v1(3342,483)
  Bottom Layer w10: v1(3342,483) 3691.03,483 3693.03,481 R21.1
OUTA+: C30.1 M1.0 M1.4 | length 801.9
  Bottom Layer w10: M1.0 M1.4 2286,2017.53 2325.1,1978.43 2325.1,1702.63 2286,1663.53 C30.1
OUTA-: C30.2 M2.0 M2.4 | length 881
  Top Layer w10: M2.4 1863.47,2017.53 ; v1(2018,1710) 2018,1863 1863.47,2017.53 ; M2.0 1863.47,2017.53
  Bottom Layer w10: v1(2018,1710) 2064.47,1663.53 C30.2
PCLK: U1.87
POWERTEST: R1.1 R2.2 U1.58 | length 2621.8
  Top Layer w10: v1(2436,1800) 2436,1535 2406,1505 2366,1505 2334.97,1473.97 2334.97,1126.03 2449,1012 2683,1012 2715.37,979.63 U1.58
  Bottom Layer w10: v1(2436,1800) 2494,1858 2764.65,1858 2770,1863.35 2770,2051 2784,2065 3126,2065 3146.09,2044.91 R1.1 3146.09,1958 3210.09,1894 3312.09,1894 3320,1901.91 3320,1992.53 R2.2
PTA0: JLink1.4 U1.50 | length 480
  Top Layer w10: JLink1.4 2451.02,1205 2621.97,1205 2689.97,1137 2732.86,1137 U1.50
PTA1: JLink1.8 U1.51 | length 1019.4
  Top Layer w10: U1.51 2932.43,1117.43 2973,1158 v1(2973,1395)
  Bottom Layer w10: JLink1.8 2435.02,1421 2591,1421 2599,1429 2939,1429 v1(2973,1395)
PTA2: JLink1.6 U1.52 | length 729.3
  Top Layer w10: JLink1.6 2351.97,1321 2351.97,1238 2384.97,1205 2418,1205 2451.97,1171.03 2451.97,1121 2542.1,1121 2579.1,1158 2599.1,1158 2659.36,1097.74 U1.52
PTA3: JLink1.2 U1.53 | length 509.8
  Top Layer w10: JLink1.2 2393.5,1116.5 2406,1104 2552.02,1104 2576.04,1128.02 2605.04,1128.02 2655,1078.06 U1.53
PTA4: U1.54
PTA5: U1.55
PTA7: Servo.3 U1.59 | length 2617.8
  Top Layer w10: U1.59 2701.05,959.95 2666,995 2550,995 2481,926 2481,231 2526,186 3828.81,186 Servo.3
PTA9: U1.61
PTA14: U1.66
PTA15: U1.67
PTA16: U1.68
PTA17: U1.69
PTA19: U1.73
PTA24: U1.75
PTA25: U1.76
PTA26: U1.77
PTA27: U1.78
PTA29: U1.80
PTB5: U1.86
PTB8: U1.89
PTB9: U1.90
PTB16: U1.95
PTB17: U1.96
PTB18: U1.97
PTB19: U1.98
PTB20: U1.99
PTB21: U1.100
PTB22: U1.101
PTB23: U1.102
PTC0: U1.103
PTC1: U1.104
PTC2: U1.105
PTC3: U1.106
PTC9: U1.114
PTC10: U1.115
PTC11: U1.116
PTC13: U1.118
PTC14: U1.119
PTC15: U1.120
PTC16: U1.123
PTC17: U1.124
PTC18: U1.125
PTC19: U1.126
PTD4: U1.131
PTD5: U1.132
PTD6: U1.133
PTD7: U1.136
PTD8: U1.137
PTD9: U1.138
PTD10: U1.139
PTD11: U1.140
PTD12: U1.141
PTD13: U1.142
PTD14: U1.143
PTD15: U1.144
PTE0: LCD.6 U1.1 | length 1527.6
  Top Layer w10: U1.1 3595.12,1507 3729,1640.88 3729,2156.17 3696,2189.17 v1(3696,2232)
  Bottom Layer w10: LCD.6 3094,2133 3227,2266 3662,2266 v1(3696,2232)
PTE1: LCD.4 U1.2 | length 1575.7
  Top Layer w10: U1.2 3575.43,1548 3709,1681.57 3709,2145 3659,2195 3659,2258 3670,2269 3722,2269 3755,2236 v1(3755,2204)
  Bottom Layer w10: LCD.4 3377,2249 3570,2249 3630,2189 3740,2189 v1(3755,2204)
PTE2: LCD.3 U1.3 | length 1085.1
  Top Layer w10: v1(3540,2212) 3573.5,2212 3692,2093.5 3692,1695.25 3555.75,1559 U1.3
  Bottom Layer w10: LCD.3 3440,2212 v1(3540,2212)
PTE3: LCD.5 U1.4 | length 1632.6
  Top Layer w10: U1.4 3536.06,1571.5 3655,1690.44 v1(3655,2028)
  Bottom Layer w10: LCD.5 3196,2133 3237.53,2091.47 3386,2091.47 3419.47,2124.94 3419.47,2158 3436,2174.53 3615,2174.53 3623.5,2166.03 3811,2166.03 3831.99,2145.04 3831.99,2053.99 3806,2028 v1(3655,2028)
PTE4: LCD.7 U1.7 | length 1144.6
  Top Layer w10: LCD.7 3003,2175 3286,2175 3316,2145 3316,1971 v1(3357,1930) ; v1(3450,1680) 3477.01,1652.99 U1.7
  Bottom Layer w10: v1(3357,1930) 3377,1910 3377,1709 3406,1680 v1(3450,1680)
PTE5: U1.8
PTE6: U1.9
PTE8: U1.11
PTE24: BT.3 U1.45 | length 2118.7
  Top Layer w10: v1(2004,907) 1897.5,800.5 1812.8,800.5 1694,681.7 1694,471 1726,439 2064.21,439 BT.3 ; v1(2715,1174) 2715,1198.54 2752,1235.54 U1.45
  Bottom Layer w10: v1(2004,907) 2075,978 2465.91,978 2481.87,962.04 2535.35,962.04 2585.31,1012 2657,1012 2715,1070 v1(2715,1174)
PTE25: BT.4 U1.46 | length 2737
  Top Layer w10: BT.4 2053,383.05 2112.05,324 2378.69,324 2378.69,477.31 2360,496 2360,916 2300,976 2300,1552 v1(2372,1624) ; v1(2767,1571) 2879,1459 2879,1228 2866.85,1215.85 U1.46
  Bottom Layer w10: v1(2372,1624) 2351,1603 2351,1536 2366,1521 2717,1521 v1(2767,1571)
PTE26: U1.47
PTE27: U1.48
PTE28: U1.49
RESET: C21.2 JLink1.10 R20.2 RESET1.2 U1.74 | length 3662.3
  Top Layer w10: RESET1.2 1389.84,284.31 v1@2395.69,284.31 ; JLink1.10 2317.97,1487 2317.97,1056.45 2395.69,978.73 2395.69,764.31 ; v1(2398,282) v1@2395.69,284.31 ; v1(2417,743) 2395.69,764.31 ; U1.74 2925.83,558.17 v1(2946,538) ; v1@2395.69,284.31 2395.69,764.31
  Bottom Layer w10: v1(2398,282) 2421.85,305.85 2620,305.85 2637,322.85 2720,322.85 2720,538 2691.87,566.13 ; v1(2417,743) 2483.23,743 R20.2 ; C21.2 2691.87,566.13 ; v1(2946,538) 2917.87,566.13 2691.87,566.13
USB0R_DM: U1.20
USB0R_DP: U1.19
VBAT: U1.42
VCC_5V: 5v.1 5v.2 5v.3 B1.2 BT.1 C22.2 C23.2 C31.1 L6.1 LM1.3 R29.1 Servo.2 | length 8204.1
  Top Layer w10: 5v.1 1195.63,653.37 1371,478 1542,478 1562,498 1562,946.48 1497.48,1011 C31.1 1624.53,1253.53 B1.2 ; v1(1944,1664) 1842,1664 1816,1638 1816,1293.16 B1.2 ; BT.1 2320.16,590.16 2322,592 2322,758 2296,784 2217,784 1855.63,1145.37 B1.2 ; LM1.3 2918,1707.98 2918,1586 v1(2898,1566)
  Bottom Layer w10: 5v.3 5v.2 5v.1 ; R29.1 1322,1530.93 1322,1558 1312,1568 1154,1568 1154,1525.77 1137.95,1509.72 1137.95,1388.05 1166,1360 1481,1360 1531,1310 1531,1227.25 1525.75,1222 1525.75,1164 ; L6.1 1525.75,1164 ; B1.2 1615.27,1253.53 1525.75,1164 ; v1(1944,1664) 1916,1636 1916,1575 1946,1545 2089,1545 2150,1606 2270,1606 2325.06,1661.06 2409,1661.06 2436.53,1633.53 C23.2 2763.22,1633.53 2763.22,1678 2783.22,1698 2898.23,1698 2918.23,1678 C22.2 2918.23,1586.23 v1(2898,1566) ; BT.1 2361,342.21 2361,258 2374,245 2435,245 2478.85,288.85 2637.26,288.85 2654.26,305.85 2763.85,305.85 2854,396 3820,396 3832.19,408.19 Servo.2
VCC_33V: 3.3v.1 3.3v.2 3.3v.3 C24.2 C25.2 CCD1.1 CCD2.1 ENCODER1.1 IMU.1 LCD.2 LM1.2 LM1.4 M1.3 M2.3 Min.1 Mout.1 R3.2 R4.2 R5.2 R8.2 R13.1 R15.1 R20.1 R22.2 R24.2 | length 13283.1
  Top Layer w10: 3.3v.1 3.3v.2 3.3v.3 1416,1678.01 ENCODER1.1 1635.53,2067.53 M2.3 ; Min.1 2286,1602.53 2329.99,1646.52 ; IMU.1 2278,631.85 2278,341.52 2361.69,341.52 2361.69,424.58 2342,444.26 2342,776 2321.68,796.32 2321.68,860.32 2306,876 2271,876 2229,918 2229,1518 2329.99,1618.99 2329.99,1646.52 ; LM1.4 LM1.2 2852.47,1798.53 2813,1838 2813,1957 2679,2091 2679,2278 2626,2331 2486,2331 2421,2266 CCD2.1 2329.99,2041.99 2329.99,1646.52 ; v1(3461,1904.42) LCD.2
  Bottom Layer w10: 3.3v.3 1580.01,1701.06 1959.97,1701.06 Min.1 ; R24.2 1947.09,686 1931.09,670 R22.2 1931.09,578 1945.09,564 2210.15,564 IMU.1 ; M1.3 2287.53,2067.53 2318,2098 2318,2181 2346,2209 2628,2209 2679,2158 2679,2086 ; CCD2.1 2468,2086 2679,2086 ; R20.1 2558.03,722 2537.75,701.72 2347.87,701.72 IMU.1 ; R13.1 3206.65,1118 3250.65,1074 3381.63,1074 3425.63,1118 R15.1 3451.73,1153.53 3611.21,1313 3764,1313 3796,1345 3928,1345 3941,1332 3986,1332 4002,1348 4002,1387 Mout.1 3786.09,1458 3726.09,1518 R4.2 3726.09,1679 3718.23,1686.86 R3.2 ; CCD1.1 3143.1,211 2290,211 2178,323 2178,408 2194.58,424.58 2362,424.58 2463.73,322.85 2604.38,322.85 2604.38,458 2568.38,494 2420.15,494 IMU.1 ; v1(3461,1904.42) 3493.07,1872.35 ; LCD.2 3402.47,2074.47 3219,2074.47 3202.47,2091 3167.89,2086 2679,2086 ; R8.2 3511.09,1617 3575.48,1681.39 C25.2 ; C24.2 3493.07,1872.35 ; R5.2 3728.23,1915.8 3718.23,1905.8 R3.2 ; 3493.07,1872.35 3400.35,1872.35 3397,1869 3397,1735.36 3414.68,1717.67 3487.45,1717.67 3498.77,1706.36 C25.2 ; C25.2 3615,1706.36 3677.17,1768.53 R3.2
VCC_BAT: JP.1 Power.2 Power.3 | length 676.9
  Top Layer w10: JP.1 458.49,629 497.8,668.3 Power.3 Power.2
VCC_BATON: F1.1 Power.1 | length 442.3
  Top Layer w10: F1.1 461.48,1476.32 497.8,1440 Power.1
"VREF OUT": C12.2 U1.37 | length 713.6
  Top Layer w10: v1(2598,1808) 2727.31,1808 2730,1805.31 2730,1473.02 2810,1393.02 U1.37
  Bottom Layer w10: v1(2598,1808) 2721.09,1808 C12.2
pads on no net: IC1.0 IR1.1 IR2.1 M1.6 M2.6 Min.2 Min.3 U1.21 U1.22 U1.40 U1.41 U1.109 U1.110 U1.111 U1.112 U1.113 U1.129 U1.130

## Silkscreen, mask and mechanical layers (free items; w line width, h text height)
Bottom Overlay:
  lines w10: 234.09,2540 234.09,2560 ; 294.09,2530 234.09,2550 ; 294.09,2570 234.09,2550 ; 1963.17,2550 234.09,2550 ; 2525,2550 4254.09,2550 ; 4194.09,2530 4254.09,2550 ; 4194.09,2570 4254.09,2550 ; 4240,145 4260,85 ; 4240,2335 4260,2395 ; 4250,85 4270,85 ; 4250,2395 4270,2395 ; 4254.09,2540 4254.09,2560 ; 4260,964.08 4260,85 ; 4260,1515.92 4260,2395 ; 4280,145 4260,85 ; 4280,2335 4260,2395
  text "4020 (mil)" at 1973.17,2514.01 h60
  text "2310 (mil)" at 4295.99,974.08 h60 r90
  text "HKUST creative group" at 916,193 h60

## Text inside footprints (layer, text, board x,y; h text height)
B1: Top Overlay "+" at 1885.63,1153.53 h60 r90
JLink1: Top Overlay "2" at 2413.49,1062.53 h50 r90; Top Overlay "1" at 2513.49,1082.53 h50 r90; Top Overlay "9" at 2513.49,1622.53 h50 r90; Top Overlay "10" at 2413.49,1622.53 h50 r90
JP: Top Overlay "-" at 656.49,277.53 h60; Top Overlay "+" at 332.49,379.53 h60; Top Overlay "M" at 574.49,555.53 h49.21